# Altium PCB NodeSpeed.PcbDoc
Units mil, origin at the board's own origin, x right, y up, seen from the top; angles counter-clockwise.
Board outline 2993.03 x 3094.03 mil, 2 copper layers (Top Layer, Bottom Layer); 16 components, 23 nets, 92 pads, 0 vias.
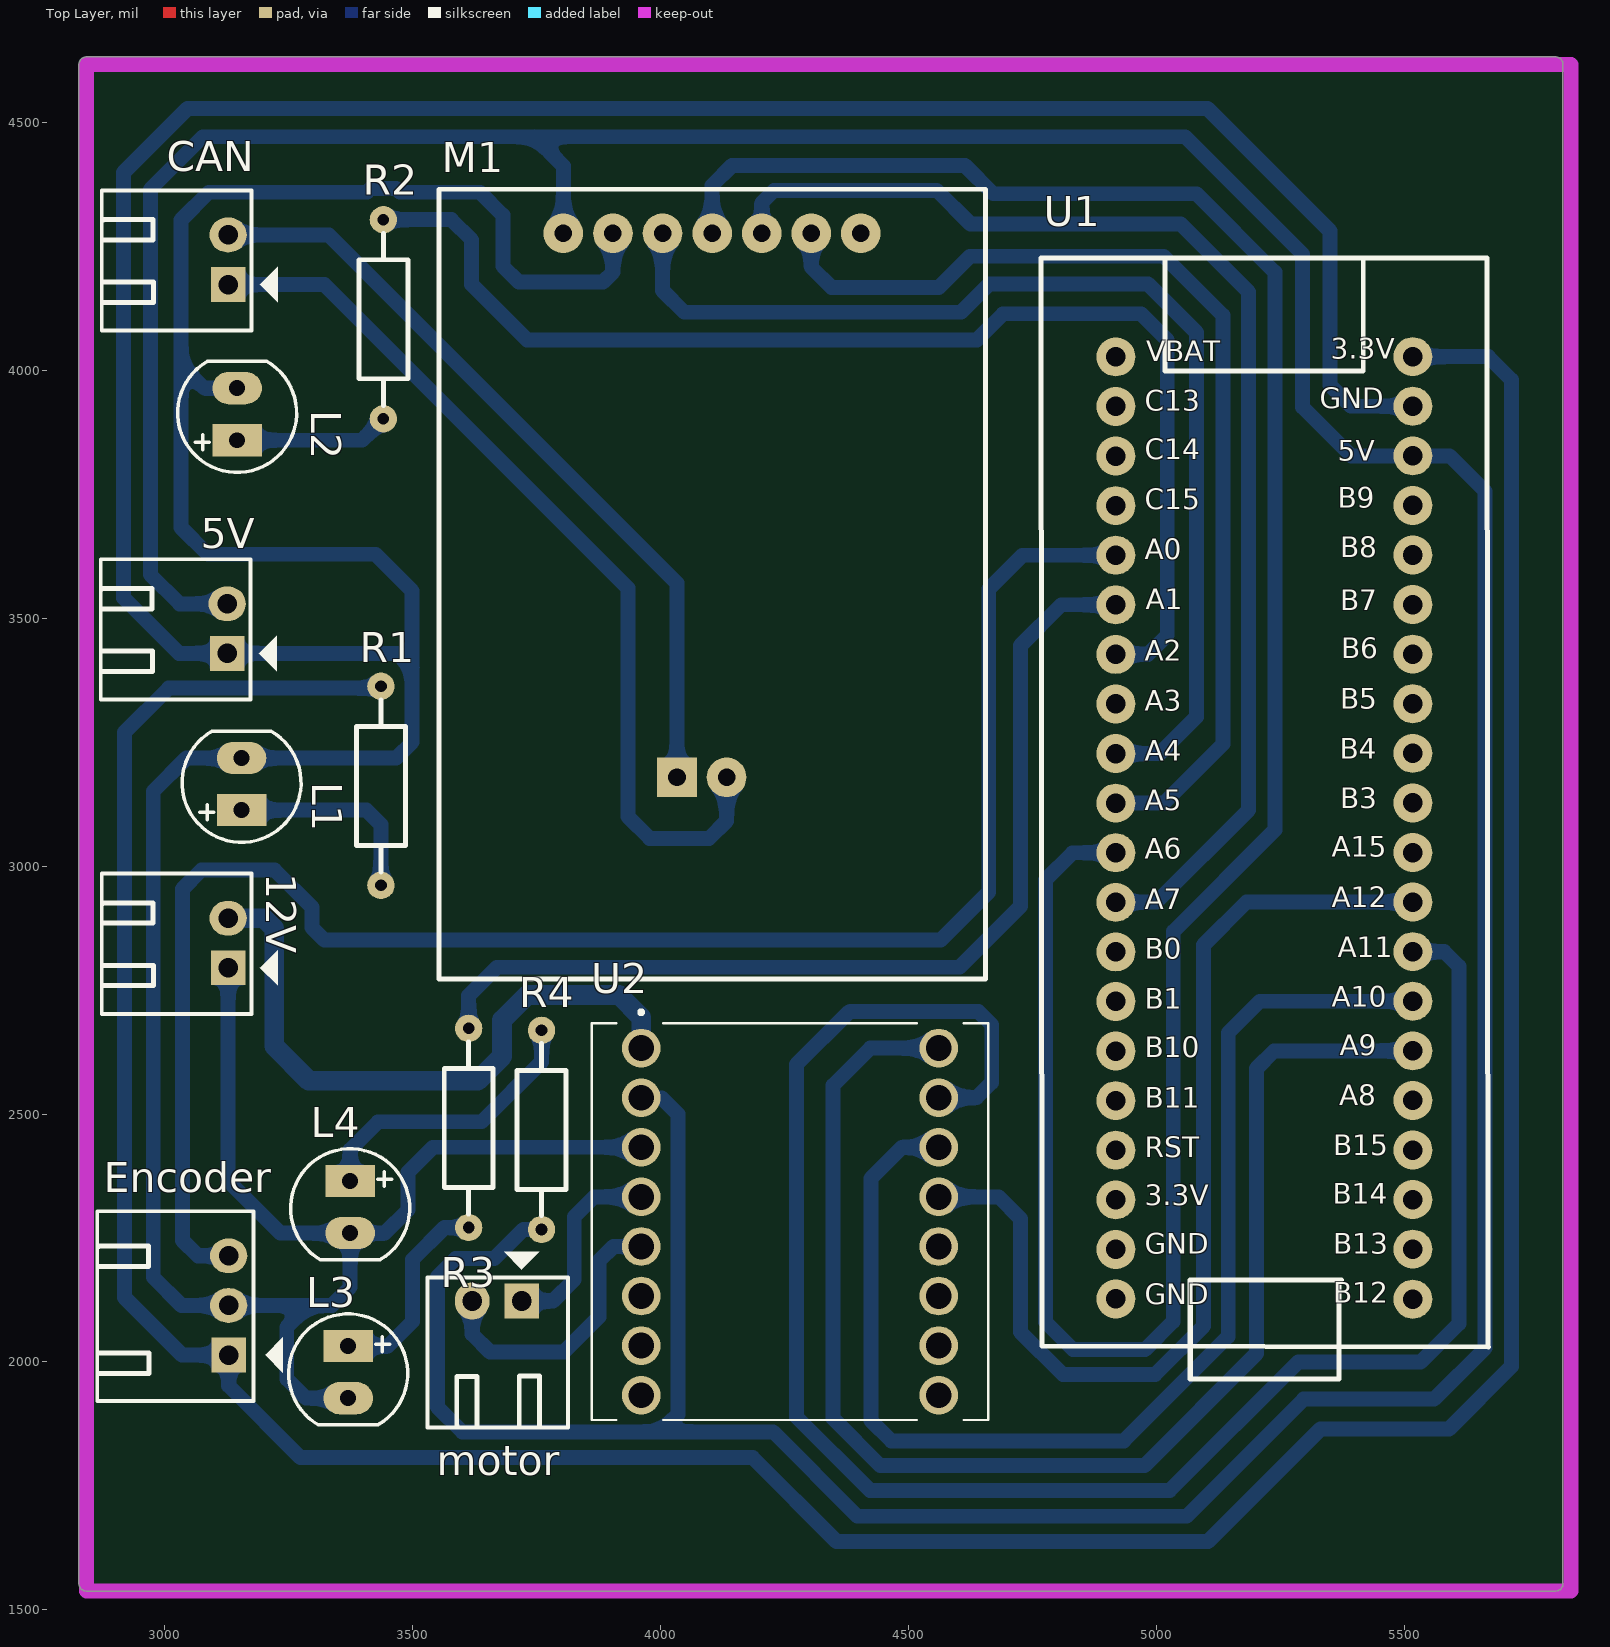
[diagram p0: Top Layer view]
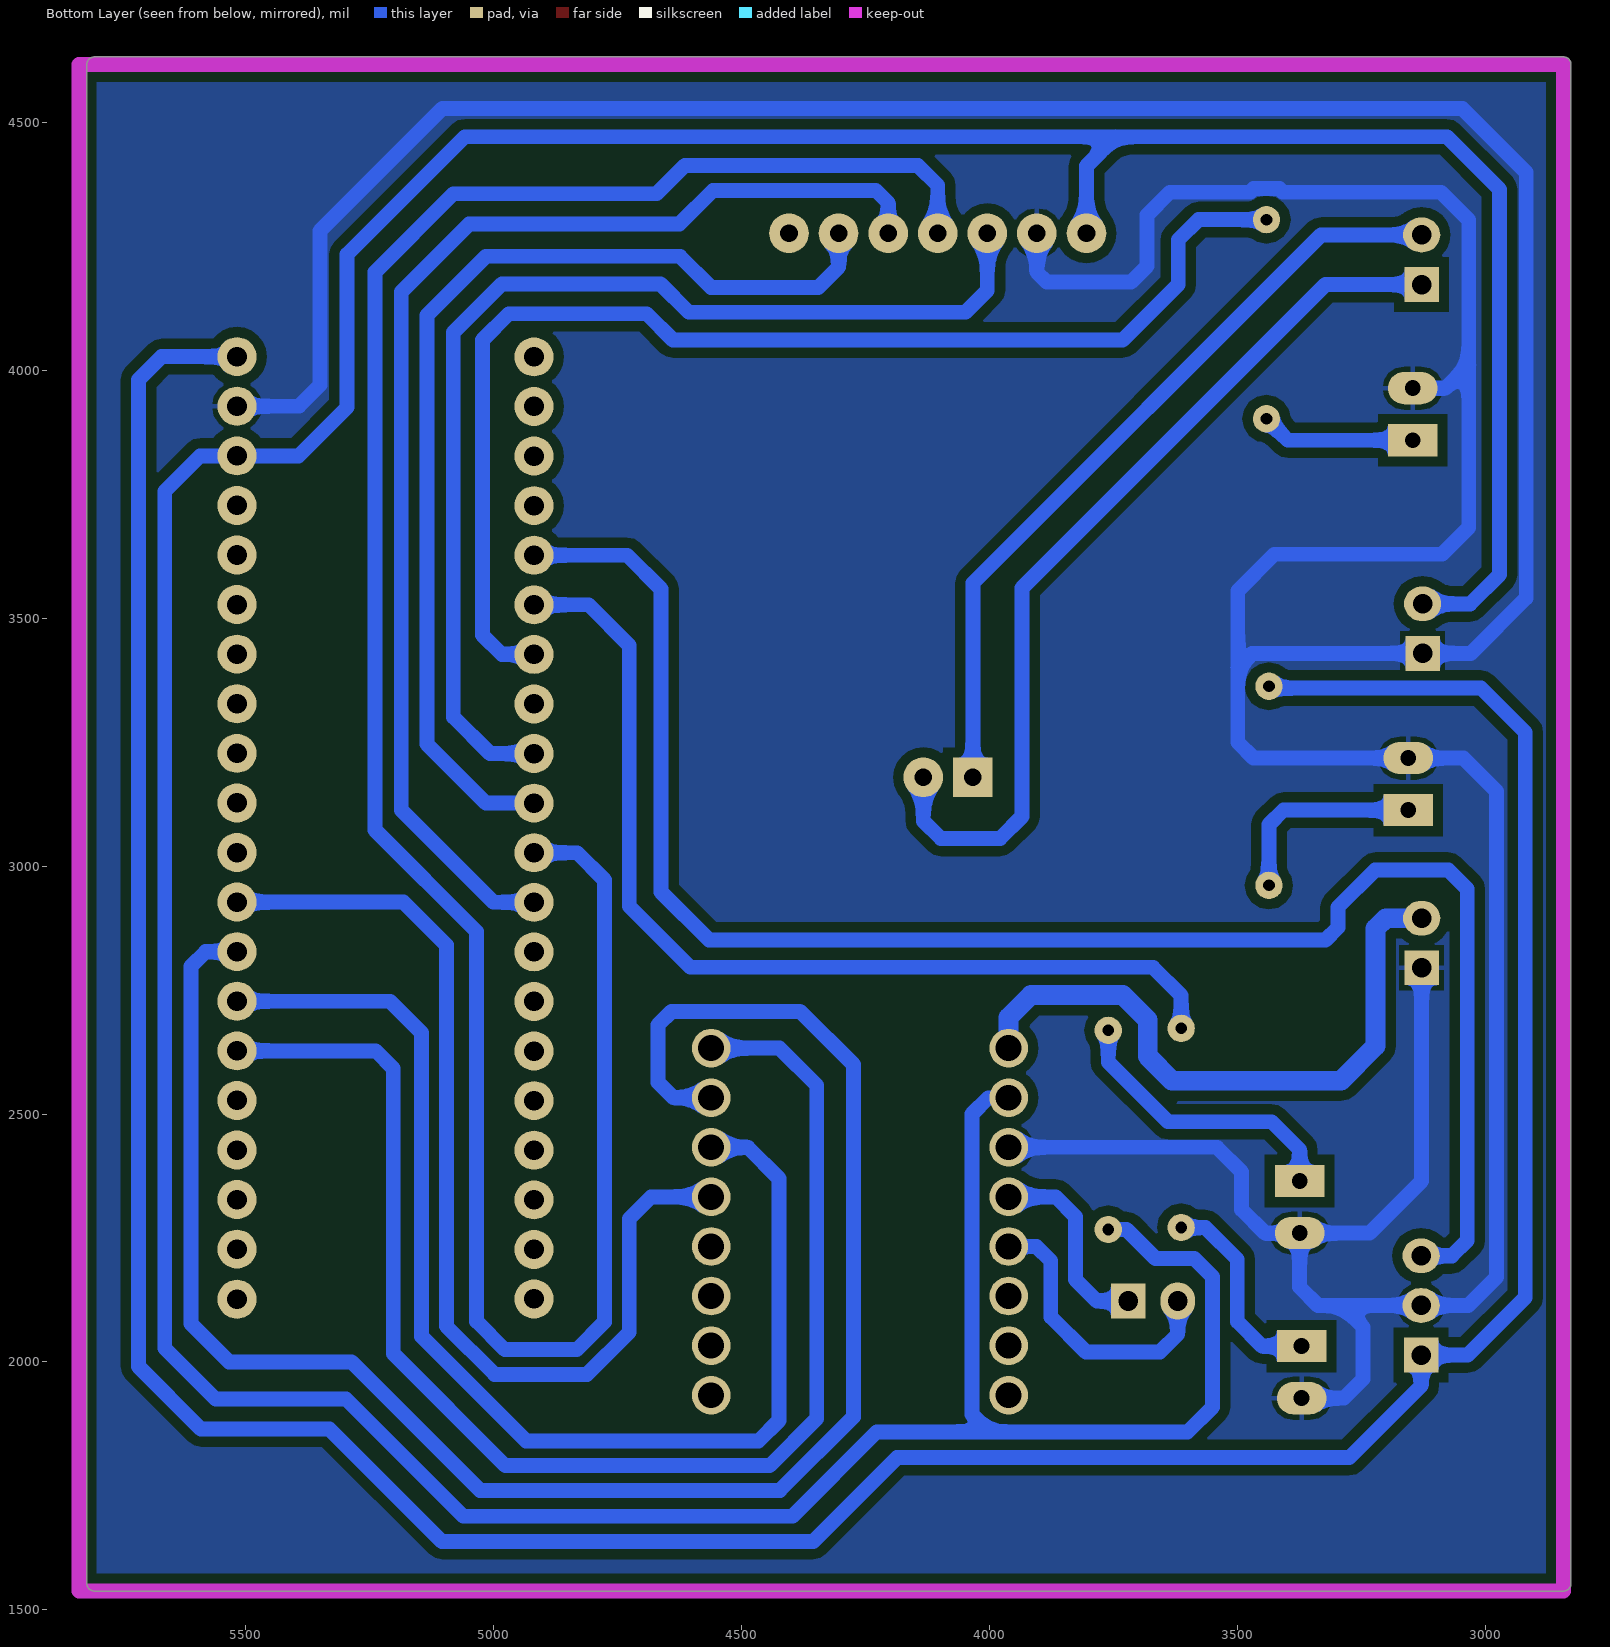
[diagram p1: Bottom Layer view, seen from below]
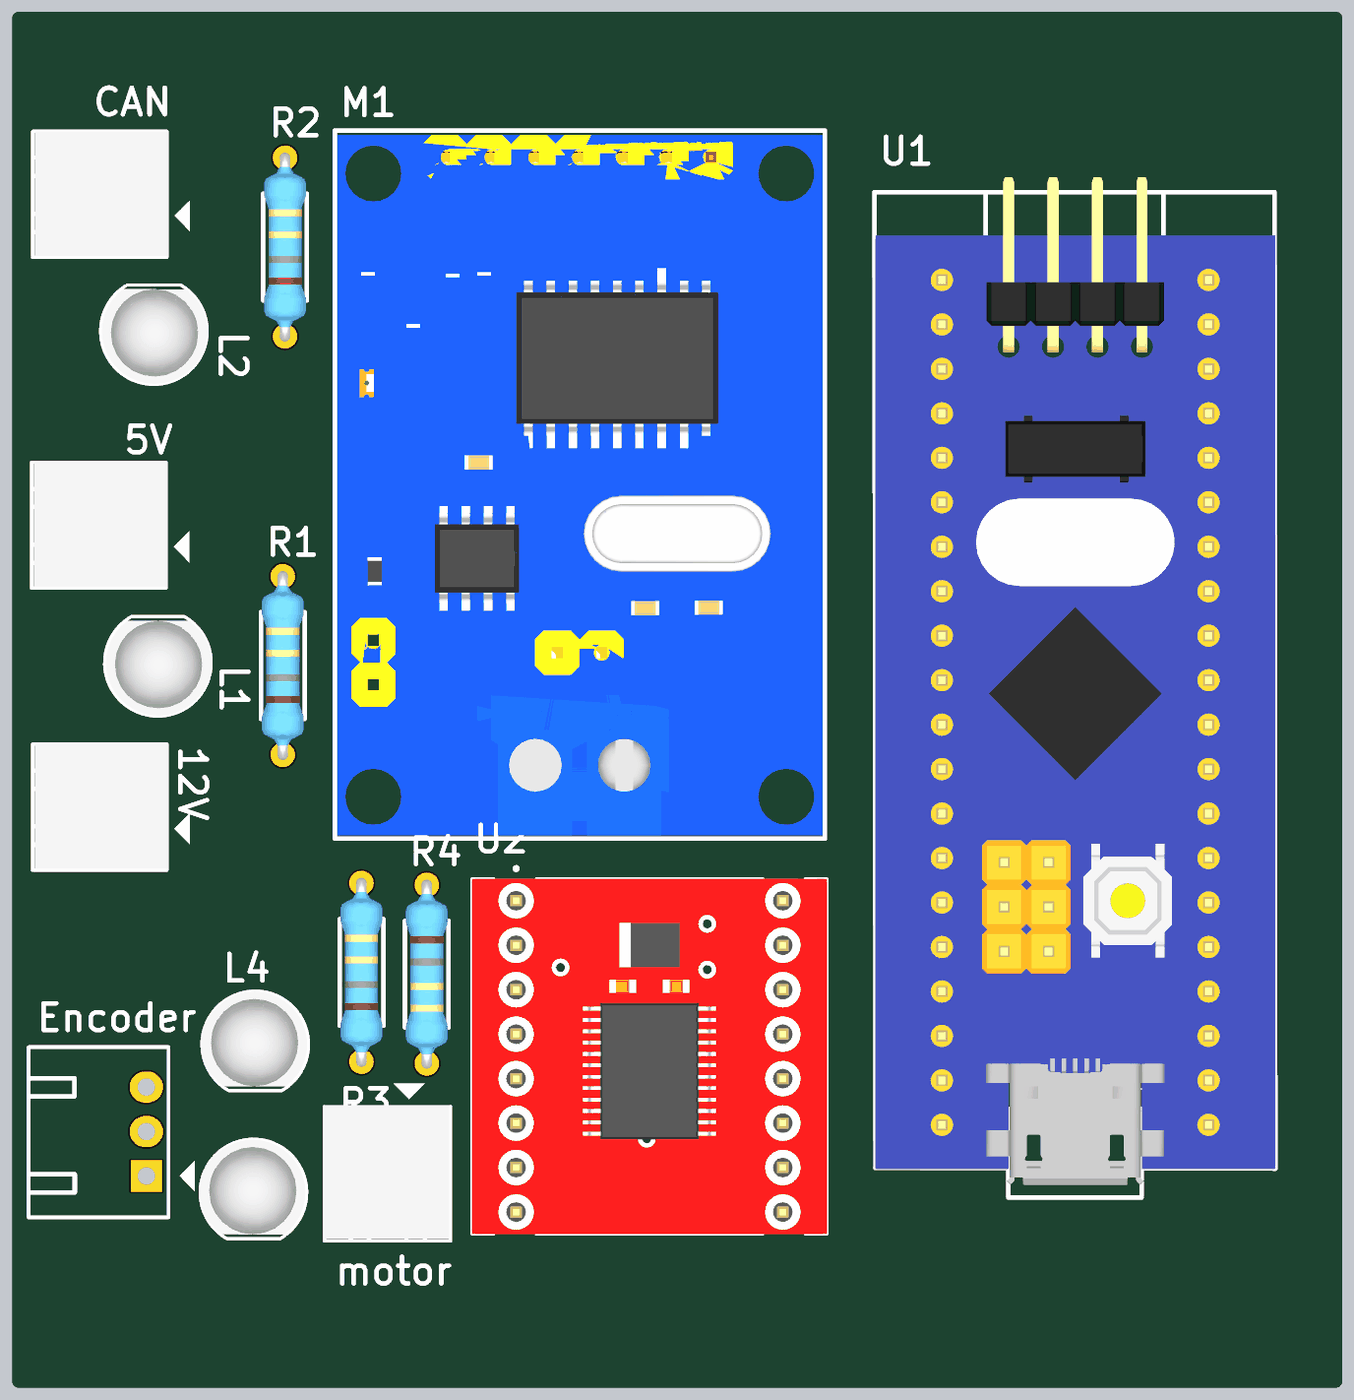
[diagram p2: 3D render of the assembled board from above, using the file's embedded part models]

## Layer stack, top to bottom
Top Solder: solder mask 0.4, Solder Resist, Dk 3.5
Top Layer: signal copper 1.4
Dielectric 1: dielectric 12.6, FR-4, Dk 4.8
Bottom Layer: signal copper 1.4
Bottom Solder: solder mask 0.4, Solder Resist, Dk 3.5

## Board outline
2826.99,1553 ccw(c2842,1553) 2842,1537.98 5805,1537.98 ccw(c5805,1553) 5820.02,1553 5820.02,4617 ccw(c5805,4617) 5805,4632.02 2842,4632.02 ccw(c2842,4617) 2826.99,4617

## Design rules (kind name [scope] priority, off if disabled: settings)
Clearance [All] p1: gap=20
PolygonConnect [All] p1: connectstyle=Relief reliefconductorwidth=10 reliefentries=4 polygonreliefangle="90 Angle" airgapwidth=10
RoutingLayers [All] p1: top layer_v5=FALSE bottom layer_v5=TRUE
RoutingVias [All] p1: holewidth=28 width=50 viastyle="Through Hole" minholewidth=28 minwidth=50 maxholewidth=28 maxwidth=50
SolderMaskExpansion [All] p1: expansion=4
Width [All] p1: maxlimit=40 minlimit=30 preferedwidth=30
29 further rules are at their usual default settings.

## Components (designator, comment, footprint, x,y, rotation, side; value= is the part's Value field where it differs from the comment)
5V "Header 2P 2.54 Duc Cong" "Header 2P DC 2.54" 3126,3429 r180 top
12V "Header 2P 2.54 Duc Cong" "Header 2P DC 2.54" 3128,2795 r180 top
CAN "" "Header 2P DC 2.54" 3128,4173 r180 top
Encoder "Header 3P 2.54 Duc Cong" "Header 3P DC 2.54" 3129,2014 r180 top
L1 "LED 5mm" LED-5MM-Green 3155,3118 r90 top
L2 "LED 5mm" LED-5MM-Green 3146,3864 r90 top
L3 "LED 5mm" LED-5MM-Green 3370,2027 r270 top
L4 "LED 5mm" LED-5MM-Green 3374,2360 r270 top
M1 "MCP2515" MCP2515_MODULE 3804,4276.24 r0 top
motor "" "Header 2P DC 2.54" 3720,2123 r270 top
R1 "1k" "tro vach 1/4w" 3436,3162 r270 top
R2 "1k" "tro vach 1/4w" 3441,4103 r270 top
R3 "1k" "tro vach 1/4w" 3613,2472 r270 top
R4 "1k" "tro vach 1/4w" 3760,2468 r90 top
U1 "STM32F103C8T6" "Stm32 BluePill" 5209,3304 r0 top
U2 "ROB-14450" MODULE_ROB-14450 4261,2283 r0 top

## Footprints (in the part's own frame and the unit in brackets; to place one, negate y for a bottom-side part, rotate by r counter-clockwise, add the part's x,y. Pads: shape width x height; smd on the part's side, far side on the other; paste and mask are expansions set on the pad)
"Header 2P DC 2.54" [mil]
  rect 70x70 hole 39.37 unplated: 1(0,0)
  oval 75x70 hole 39.37 unplated: 2(0,-100)
  silkscreen extent -100,-190 255,93, body extent -50,-190 250,90, height 237
"Header 3P DC 2.54" [mil]
  rect 70x70 hole 39.37 unplated: 1(0,0)
  oval 75x70 hole 39.37 unplated: 2(0,-100) 3(0,-200)
  silkscreen extent -110,-290 265,93
LED-5MM-Green [mil] "LED 2 PIN, 5 ly , Only colour,pin to pin 100mil"
  rect 65x100 hole 32: 1(-5,0)
  oval 65x100 hole 32: 2(100,0)
  silkscreen extent -70,-120 154,120, body extent -69,-120 145,117, height 339
MCP2515_MODULE [mil]
  round 80 hole 35.43: 1(600,0) 2(500,0) 3(400,0) 4(300,0) 5(200,0) 6(100,0) 7(0,0) 9(329.13,-1097.28)
  rect 80x80 hole 35.43: 8(229.13,-1097.28)
  silkscreen extent -251,-1504 851,89, body extent -251,-1496 851,79, height 394
MODULE_ROB-14450 [mm]
  round 1.98 hole 1.32: 1(-7.62,8.89) 2(-7.62,6.35) 3(-7.62,3.81) 4(-7.62,1.27) 5(-7.62,-1.27) 6(-7.62,-3.81) 7(-7.62,-6.35) 8(-7.62,-8.89) 9(7.62,-8.89) 10(7.62,-6.35) 11(7.62,-3.81) 12(7.62,-1.27) 13(7.62,1.27) 14(7.62,3.81) 15(7.62,6.35) 16(7.62,8.89)
  silkscreen extent -10.16,-10.16 10.16,10.83, body extent -10.16,-10.16 10.16,10.16, height 5.5
"Stm32 BluePill" [mm]
  round 2 hole 1: 1(7.828,-29.909) 2(7.828,-27.343) 3(7.828,-24.803) 4(7.828,-22.263) 5(7.828,-19.723) 6(7.828,-17.183) 7(7.828,-14.643) 8(7.828,-12.103) 9(7.828,-9.563) 10(7.828,-7.023) 11(7.828,-4.483) 12(7.828,-1.943) 13(7.828,0.597) 14(7.828,3.137) 15(7.828,5.677) 16(7.828,8.217) 17(7.828,10.757) 18(7.828,13.297) 19(7.828,15.837) 20(7.828,18.377) 21(-7.386,18.366) 22(-7.386,15.826) 23(-7.386,13.286) 24(-7.386,10.746) 25(-7.386,8.206) 26(-7.386,5.666) 27(-7.386,3.126) 28(-7.386,0.586) 29(-7.386,-1.954) 30(-7.386,-4.494) 31(-7.386,-7.034) 32(-7.386,-9.574) 33(-7.386,-12.114) 34(-7.386,-14.654) 35(-7.386,-17.194) 36(-7.386,-19.734) 37(-7.386,-22.274) 38(-7.386,-24.814) 39(-7.386,-27.354) 40(-7.386,-29.894)
  silkscreen extent -11.22,-34 11.69,23.43, body extent -11.18,-33.27 11.68,24.29, height 12.31
"tro vach 1/4w" [mm]
  round 1.4 hole 0.6: 1(-5.1,0) 2(5.1,0)
  silkscreen extent -4.39,-1.25 4.42,1.25, body extent -5.38,-1.2 5.38,1.2, height 2.41

## Part data
5V 12V Encoder: "Cắm"
CAN motor: library part "Header 2P 2.54 Duc Cong", "Cắm"
L1 L2 L3 L4: library part "LED 5mm Xanh La", "Cắm"
R1 R2 R3 R4: library part "Tro Vach 1/4W 5% 1k", "Cắm"
U1: library part BluePill, "Designed By @Alixahedi"
U2: "TB6612FNG Motor Controller/Driver Power Management Evaluation Board"

## Nets (pads, with @x,y where several pads share a name; then routed paths per layer and width w, separated by ;. In a path a pad name is that pad's centre, name@x,y a point inside that pad or via, vN(x,y) a via of type N, cw(c..) or ccw(c..) an arc to the next point about the centre after c; other vN are vias at no path point)
3V3: Encoder.1 R1.1 U1.20 | length 7089
  Bottom Layer w30: R1.1 3436,3359 3008,3359 2919,3270 2919,2130 3035,2014 Encoder.1 3129,1952 3274,1807 4186,1807 4355,1638 5104,1638 5331,1865 5590,1865 5716,1991 5716,3981 5669.5,4027.5 U1.20
5V: 5V.2 M1.7 R4.1 U1.18 U2.2 | length 9716.6
  Bottom Layer w30: 5V.2 3030,3529 2971,3588 2971,4365 3077,4471 5058,4471 5295,4234 5295,3925.5 5393,3827.5 U1.18 5591.5,3827.5 5663,3756 5663,2028 5560,1925 5297,1925 5061,1689 4397,1689 4227,1859 4000,1859 ; 3745,4471 3804,4412 M1.7 ; R4.1 3723.21,2267.21 3664.65,2208.65 3586.65,2208.65 3550,2172 3550,1909 3600,1859 4000,1859 ; U2.2 4002,2533 4035,2500 4035,1894 4000,1859
12V: 12V.2 U2.1 | length 1302.5
  Bottom Layer w40: 12V.2 3200,2895 3221,2874 3221,2637 3290.64,2567.36 3631.36,2567.36 3680.56,2616.56 3680.56,2689.56 3731,2740 3916,2740 3961,2695 U2.1
CS_CAN: M1.5 U1.29 | length 2243.1
  Bottom Layer w30: M1.5 4004,4161 4048,4117 4606,4117 4663,4174 4983.1,4174 5081,4076.1 5081,3301 5007.07,3227.07 U1.29
ENA: U1.6 U2.16 | length 2807.9
  Bottom Layer w30: U2.16 4423,2633 4348,2558 4348,1886 4443,1791 4976,1791 5202,2017 5202,2592 5237.5,2627.5 U1.6
ENCODER: Encoder.3 U1.25 | length 3474.6
  Bottom Layer w30: Encoder.3 3067,2214 3036,2245 3036,2954 3074,2992 3222,2992 3297,2917 3297,2876 3322,2851 4565,2851 4662,2948 4662,3559 4730.07,3627.07 U1.25
GND: 5V.1 12V.1 Encoder.2 L1.2 L2.2 L3.2 L4.2 M1.6 U1.19 U2.3 | length 11098.5
  Bottom Layer w30: 12V.1 3128,2365 3233,2260 L4.2 ; L2.2 3080,3964 3033,4011 ; L3.2 3285,1927 3246,1966 3246,2070 3290,2114 ; M1.6 3904,4198 3884,4178 3714,4178 3682,4210 3682,4313 3636,4359 3474.26,4359 3466.91,4366.35 3415.09,4366.35 3407.74,4359 3089,4359 3033,4303 3033,4011 ; U2.3 3541,2433 3491,2383 3491,2307 3444,2260 L4.2 ; U1.19 5392.5,3927.5 5350,3970 5350,4281 5103,4528 3046,4528 2917,4399 2917,3541 3029,3429 5V.1 3470,3429 3499,3400 ; 3033,4011 3033,3683 3087,3629 3425,3629 3499,3555 3499,3400 ; 3290,2114 3337,2114 3374,2151 L4.2 ; 3290,2114 Encoder.2 3034,2114 2977,2171 2977,3151 3044,3218 L1.2 3467,3218 3499,3250 3499,3400
H: CAN.2 M1.8 | length 1587.9
  Bottom Layer w30: CAN.2 3331,4273 4033.13,3570.87 M1.8
IN1: U1.7 U2.14 | length 2487
  Bottom Layer w30: U2.14 4487,2433 4424.1,2370.1 4424.1,1882.07 4465.17,1841 4934.42,1841 5145,2051.58 5145,2664 5208.5,2727.5 U1.7
IN2: U1.8 U2.15 | length 3758.7
  Bottom Layer w30: U2.15 4637,2533 4668,2564 4668,2680 4641.02,2706.98 4382.98,2706.98 4382,2706 4380,2706 4274,2600 4274,1889.29 4422.29,1741 5027,1741 5286,2000 5533,2000 5610,2077 5610,2798 5580.5,2827.5 U1.8
L: CAN.1 M1.9 | length 1840.2
  Bottom Layer w30: CAN.1 3322,4173 3934,3561 3934,3100 3978,3056 4098,3056 4133.13,3091.13 M1.9
LED_CAN: R2.1 U1.27 | length 2493.1
  Bottom Layer w30: R2.1 3578.21,4303.79 3619,4263 3619,4173 3731,4061 4638,4061 4691,4114 4969,4114 5022,4061 5022,3466 4983.07,3427.07 U1.27
LED_ENCODER: R3.1 U1.26 | length 2006
  Bottom Layer w30: R3.1 3613,2739 3670,2796 4603,2796 4726,2919 4726,3445 4808.07,3527.07 U1.26
MISO: M1.4 U1.31 | length 4899.1
  Bottom Layer w30: M1.4 4104,4373 4144,4413 4614,4413 4671,4356 5081,4356 5239,4198 5239,3073 5034,2868 5034,2082 4977,2025 4832,2025 4776,2081 4776,2972 4831.07,3027.07 U1.31
MOSI: M1.3 U1.32 | length 2528.8
  Bottom Layer w30: M1.3 4204,4338 4229,4363 4557,4363 4625,4295 5049,4295 5186,4158 5186,3113.07 5000,2927.07 U1.32
MOTOR1: motor.1 U2.4 | length 402.4
  Bottom Layer w30: motor.1 3783,2123 3826,2166 3826,2293 3866,2333 U2.4
MOTOR2: motor.2 U2.5 | length 577.3
  Bottom Layer w30: motor.2 3620,2056 3656,2020 3805,2020 3876,2091 3876,2204 3905,2233 U2.5
NetL1_1: L1.1 R1.2 | length 415.8
  Bottom Layer w30: L1.1 3407,3113 3436,3084 R1.2
NetL2_1: L2.1 R2.2 | length 312.9
  Bottom Layer w30: L2.1 3397.79,3859 R2.2
NetL3_1: L3.1 R3.2 | length 415.3
  Bottom Layer w30: L3.1 3450,2032 3500,2082 3500,2207 3564.21,2271.21 R3.2
NetL4_1: L4.1 R4.2 | length 586.1
  Bottom Layer w30: L4.1 3374,2428 3430.5,2484.5 3639.5,2484.5 3760,2605 R4.2
SCK: M1.2 U1.30 | length 2120.6
  Bottom Layer w30: M1.2 4304,4208 4345,4167 4561,4167 4624,4230 5014.93,4230 5134,4110.93 5134,3246 5015.07,3127.07 U1.30
STBY: U1.9 U2.13 | length 2083.3
  Bottom Layer w30: U2.13 4682,2333 4726,2289 4726,2060.29 4811.29,1975 4997.71,1975 5095,2072.29 5095,2841 5181.5,2927.5 U1.9
pads on no net: M1.1 U1.1 U1.2 U1.3 U1.4 U1.5 U1.10 U1.11 U1.12 U1.13 U1.14 U1.15 U1.16 U1.17 U1.21 U1.22 U1.23 U1.24 U1.28 U1.33 U1.34 U1.35 U1.36 U1.37 U1.38 U1.39 U1.40 U2.6 U2.7 U2.8 U2.9 U2.10 U2.11 U2.12

## Polygon pours and split planes (outlines as drawn)
GND on Bottom Layer "Bottom Layer-No Net" (solid, remove dead copper, pour order 32): 2842,4617 5836,4617 5836,1538 2842,1538

## Keep-outs
Keep-Out Layer:
  lines w30: 2842,1538 5836,1538 5836,4617 2842,4617 2842,1538

## Text inside footprints (layer, text, board x,y; h text height)
U1: Top Overlay "5V" at 5366.2,3803.78 h70; Top Overlay "B9" at 5366.2,3708.78 h70; Top Overlay "B8" at 5371.2,3608.78 h70; Top Overlay "3.3V" at 5351.2,4008.78 h70; Top Overlay "GND" at 5329,3909.78 h70; Top Overlay "A5" at 4976.2,3098.78 h70; Top Overlay "A2" at 4976.2,3400 h70; Top Overlay "A3" at 4976.2,3299.78 h70; Top Overlay "A4" at 4976.2,3198 h70; Top Overlay "RST" at 4976.2,2398.78 h70; Top Overlay "B10" at 4976.2,2600.78 h70; Top Overlay "B11" at 4976.2,2499 h70; Top Overlay "A6" at 4976.2,3000.78 h70; Top Overlay "A7" at 4976.2,2899 h70; Top Overlay "B0" at 4976.2,2798.78 h70; Top Overlay "B1" at 4976.2,2698 h70; Top Overlay "3.3V" at 4976.2,2301.78 h70; Top Overlay "B15" at 5356.6,2402.78 h70; Top Overlay "A8" at 5368.7,2503.78 h70; Top Overlay "A11" at 5365.4,2802 h70; Top Overlay "B3" at 5371.2,3102.78 h70; Top Overlay "A9" at 5369.9,2604.78 h70; Top Overlay "A15" at 5354.1,3004.78 h70; Top Overlay "A12" at 5354.1,2903 h70; Top Overlay "A10" at 5354.1,2702.78 h70; Top Overlay "VBAT" at 4979.06,4004 h70; Top Overlay "B5" at 5371.2,3303.78 h70; Top Overlay "B14" at 5355.4,2305 h70; Top Overlay "B7" at 5371.2,3502 h70; Top Overlay "B4" at 5369.9,3202 h70; Top Overlay "B6" at 5372.4,3404.78 h70; Top Overlay "C15" at 4976.2,3705.78 h70; Top Overlay "C13" at 4976.2,3904.78 h70; Top Overlay "C14" at 4976.2,3806.78 h70; Top Overlay "A0" at 4976.2,3604.78 h70; Top Overlay "A1" at 4979,3504 h70; Top Overlay "GND" at 4976.2,2203.78 h70; Top Overlay "B13" at 5356.2,2203.78 h70; Top Overlay "GND" at 4976.2,2102.78 h70; Top Overlay "B12" at 5356.6,2105 h70